# EAGLE board 1 (EAGLE 7.2.0)
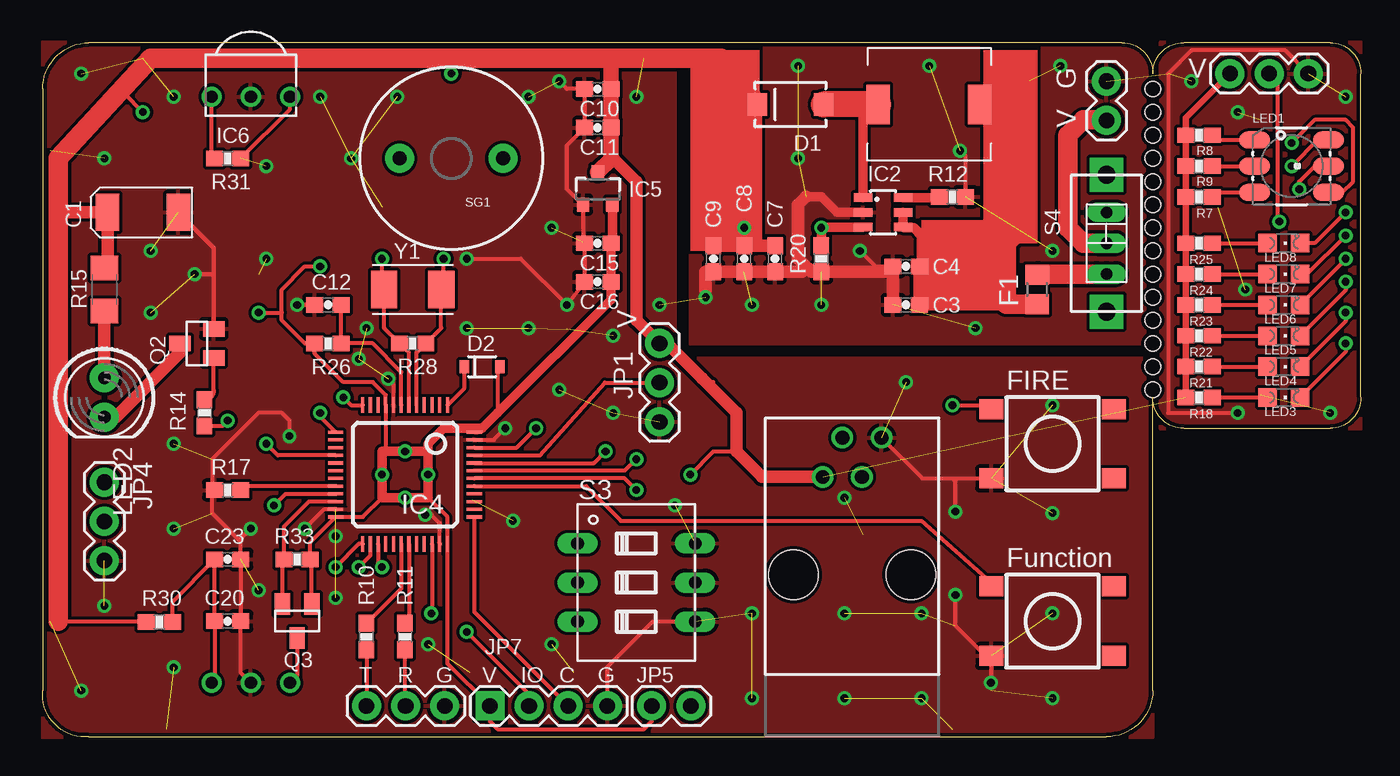
[diagram p0: board, top side]
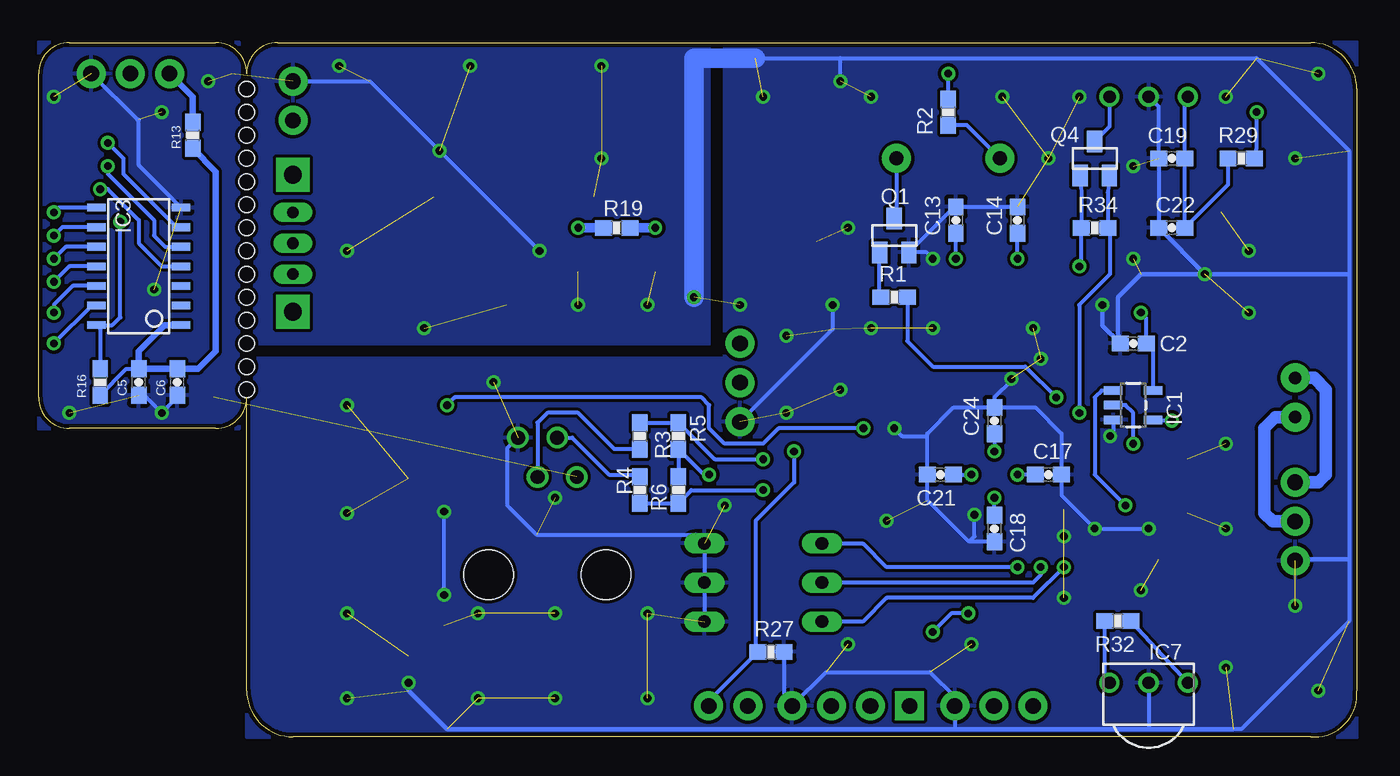
[diagram p1: board, bottom side, seen from below]

Size 85.51 x 45.01 mm. Coordinates in mm from the lower left corner, seen from the top.
Outline: 83.51,45.01 74.01,45.01 arc90 72.01,43.01 arc90 70.01,45.01 3.01,45.01 arc90 0.01,42.01 0.01,3.01 arc100 3.01,0.01 69.01,0.01 arc90 72.01,3.01 72.01,22.01 arc90 74.01,20.01 83.51,20.01 arc90 85.51,22.01 85.51,43.01 arc90 83.51,45.01
Copper layers (1*16): Top 0.035mm / dielectric 1.5mm / Bottom 0.035mm
Design rules "default *": minimum track width 10mil, minimum drill 0.5mm, track to track 8mil, track to pad 8mil, pad to pad 8mil, via to via 8mil, smd to smd 8mil, copper to edge 10mil, drill to drill 8mil, minimum pad ring 10mil, minimum via ring 8mil, stop-mask expansion 4mil, vias tented up to drill 0mil, thermal gap 10mil
Holes 1 mm at 72.01,42.01 72.01,40.51 72.01,39.01 72.01,37.51 72.01,36.01 72.01,34.51 72.01,33.01 72.01,31.51 72.01,30.01 72.01,28.51 72.01,27.01 72.01,25.51 72.01,24.01 72.01,22.51

## Footprints (pad centres in the part's own frame; a part is rotated, then mirrored left to right if it is on the bottom)
EIA6032 = smd 1.5 x 2.4: P$1 -2.3,0; P$2 2.3,0
0603-CAP = smd 1.1 x 1: 1 -0.85,0; 2 0.85,0
SMA-DIODE = smd 1.27 x 1.47: A -2.15,0; C 2.15,0
SOD-323 = smd 0.63 x 0.83: 1 -1.15,0; 2 1.15,0
R0805 = smd 1.3 x 1.5: 1 -0.95,0; 2 0.95,0
SOT23-5 = smd 0.55 x 1.2: 1 -0.95,-1.3; 2 0,-1.3; 3 0.95,-1.3; 4 0.95,1.3; 5 -0.95,1.3
SOT23-6 = smd 0.55 x 1.2: 1 -0.95,-1.3; 2 0,-1.3; 3 0.95,-1.3; 4 0.95,1.3; 5 0,1.3; 6 -0.95,1.3
SOP-14 = smd 0.5 x 1.2: 1 -3.81,-2.75; 2 -2.54,-2.75; 3 -1.27,-2.75; 4 0,-2.75; 5 1.27,-2.75; 6 2.54,-2.75; 7 3.81,-2.75; 8 3.81,2.75; 9 2.54,2.75; 10 1.27,2.75; 11 0,2.75; 12 -1.27,2.75; 13 -2.54,2.75; 14 -3.81,2.75
TQFP48 = smd 0.2 x 1: 1 -2.75,-4.5; 2 -2.25,-4.5; 3 -1.75,-4.5; 4 -1.25,-4.5; 5 -0.75,-4.5; 6 -0.25,-4.5; 7 0.25,-4.5; 8 0.75,-4.5; 9 1.25,-4.5; 10 1.75,-4.5; 11 2.25,-4.5; 12 2.75,-4.5; 25 2.75,4.5; 26 2.25,4.5; 27 1.75,4.5; 28 1.25,4.5; 29 0.75,4.5; 30 0.25,4.5; 31 -0.25,4.5; 32 -0.75,4.5; 33 -1.25,4.5; 34 -1.75,4.5; 35 -2.25,4.5; 36 -2.75,4.5 | smd 1 x 0.2: 13 4.5,-2.75; 14 4.5,-2.25; 15 4.5,-1.75; 16 4.5,-1.25; 17 4.5,-0.75; 18 4.5,-0.25; 19 4.5,0.25; 20 4.5,0.75; 21 4.5,1.25; 22 4.5,1.75; 23 4.5,2.25; 24 4.5,2.75; 37 -4.5,2.75; 38 -4.5,2.25; 39 -4.5,1.75; 40 -4.5,1.25; 41 -4.5,0.75; 42 -4.5,0.25; 43 -4.5,-0.25; 44 -4.5,-0.75; 45 -4.5,-1.25; 46 -4.5,-1.75; 47 -4.5,-2.25; 48 -4.5,-2.75
SOT23-3 = smd 0.8 x 0.9: 1 -0.95,-1; 2 0.95,-1; 3 0,1.1
TSOP348 = drill 0.8: 1 -2.54,0; 2 0,0; 3 2.54,0
RJ9 = drill 0.889: 1 -1.905,6.35; 2 -0.635,8.89; 3 0.635,6.35; 4 1.905,8.89 | hole 3.2: -3.81,0; 3.81,0
1X03 = drill 1.016 pad 1.88: 1 0,0; 2 2.54,0; 3 5.08,0
1X02 = drill 1.016 pad 1.88: 1 0,0; 2 2.54,0
1X04 = drill 1.016 pad 1.88 square: 1 0,0 | drill 1.016 pad 1.88: 2 2.54,0; 3 5.08,0; 4 7.62,0
CR75_V2 = smd 1.524 x 2.54: P$1 -0.254,0; P$2 6.304,0
LED-TRICOLOR-5050 = smd 2 x 1.1: 1 -2.4,1.7; 2 -2.4,0; 3 -2.4,-1.7; 4 2.4,-1.7; 5 2.4,0; 6 2.4,1.7
LED5MM = drill 0.813 pad 1.88: A -1.27,0; K 1.27,0
CHIPLED_0805 = smd 1.2 x 1.2: A 0,-1.05; C 0,1.05
SOT23 = smd 1 x 1.4: 1 -0.95,-1.1; 2 0.95,-1.1; 3 0,1.1
0603-RES = smd 1.1 x 1: 1 -0.85,0; 2 0.85,0
1206 = smd 1.6 x 1.8: 1 -1.4,0; 2 1.4,0
TACTILE_SWITCH_TALL = smd 1.55 x 1.3: A1 -3.975,-2.25; A2 3.975,-2.25; B1 -3.975,2.25; B2 3.975,2.25
DIP03YL = drill 0.813 long: 1 -2.54,-3.81; 2 0,-3.81; 3 2.54,-3.81; 4 2.54,3.81; 5 0,3.81; 6 -2.54,3.81
SWITCH-SPDT-AM#6 = drill 0.762 pad 1.27 long: 1 0,2; 2 0,0; 3 0,-2 | drill 1.15 pad 2.184 square: P$1 0,-4.445; P$2 0,4.445
BUZZER-12MM-KIT = drill 0.9 pad 1.88: + 3.35,0; - -3.35,0
CRYSTAL-TXC-7A = smd 1.7 x 2.4: P$1 1.85,0; P$2 -1.85,0

## Placement (x,y rotation side)
C1  100uf  [EIA6032]  6.51,34.01 0 top
C2  100nf  [0603-CAP]  14.51,25.51 180 bottom
C3  100nf  [0603-CAP]  56.01,28.01 180 top
C4  10uf  [0603-CAP]  56.01,30.51 180 top
C5  1uf  [0603-CAP]  79.01,23.01 90 bottom
C6  100nf  [0603-CAP]  76.51,23.01 90 bottom
C7  10uf  [0603-CAP]  47.51,31.01 90 top
C8  10uf  [0603-CAP]  45.51,31.01 90 top
C9  100nf  [0603-CAP]  43.51,31.01 90 top
C10  1uf  [0603-CAP]  36.01,42.01 180 top
C11  100nf  [0603-CAP]  36.01,39.51 180 top
C12  1uf  [0603-CAP]  18.51,28.01 180 top
C13  20p  [0603-CAP]  26.01,33.51 90 bottom
C14  20p  [0603-CAP]  22.01,33.51 90 bottom
C15  1uf  [0603-CAP]  36.01,32.01 180 top
C16  100nf  [0603-CAP]  36.01,29.51 180 top
C17  100nf  [0603-CAP]  20.01,17.01 0 bottom
C18  100nf  [0603-CAP]  23.51,13.51 270 bottom
C19  100nf  [0603-CAP]  12.01,37.51 180 bottom
C20  100nf  [0603-CAP]  12.01,7.51 0 top
C21  100nf  [0603-CAP]  27.01,17.01 180 bottom
C22  4.7uf  [0603-CAP]  12.01,33.01 180 bottom
C23  4.7uf  [0603-CAP]  12.01,11.51 0 top
C24  4.7uf  [0603-CAP]  23.51,20.51 90 bottom
D1  SS34  [SMA-DIODE]  48.51,41.01 180 top
D2  BAT20JFILM  [SOD-323]  28.51,24.01 0 top
F1  [R0805]  64.51,29.01 270 top
IC1  SN74LVC1G08  [SOT23-5]  14.51,21.51 270 bottom
IC2  FP6291  [SOT23-6]  54.51,34.01 270 top
IC3  TM1809  [SOP-14]  79.01,30.51 90 bottom
IC4  STM32F10XCXT6  [TQFP48]  23.51,17.01 180 top
IC5  [SOT23-3]  36.01,35.51 0 top
IC6  TSOP34830  [TSOP348]  13.51,41.51 180 top
IC7  TSOP34830  [TSOP348]  13.51,3.51 0 bottom
J1  RJ9PTH  [RJ9]  52.51,10.51 0 top
JP1  [1X03]  40.01,25.51 270 top
JP2  [1X03]  77.01,43.01 0 top
JP3  M02PTH  [1X02]  69.01,42.51 270 top
JP4  [1X03]  4.01,16.51 270 top
JP5  M02PTH  [1X02]  39.51,2.01 0 top
JP6  [1X03]  21.01,2.01 0 top
JP7  [1X04]  29.01,2.01 0 top
L1  4.7uh  [CR75_V2]  60.51,41.01 180 top
LED1  LED-TRICOLOR-5050NO_IC  [LED-TRICOLOR-5050]  81.01,37.01 0 top
LED2  IR  [LED5MM]  4.01,22.01 270 top
LED3  [CHIPLED_0805]  80.51,22.01 270 top
LED4  [CHIPLED_0805]  80.51,24.01 270 top
LED5  [CHIPLED_0805]  80.51,26.01 270 top
LED6  [CHIPLED_0805]  80.51,28.01 270 top
LED7  [CHIPLED_0805]  80.51,30.01 270 top
LED8  [CHIPLED_0805]  80.51,32.01 270 top
Q1  8050  [SOT23]  30.01,32.51 0 bottom
Q2  8050  [SOT23]  10.01,25.51 90 top
Q3  2N7002  [SOT23]  16.51,7.51 180 top
Q4  2N7002  [SOT23]  17.01,37.51 0 bottom
R1  2.2K  [0603-RES]  30.01,28.51 0 bottom
R2  180R  [0603-RES]  26.51,40.51 90 bottom
R3  100R  [0603-RES]  46.51,19.51 90 bottom
R4  100R  [0603-RES]  46.51,16.01 270 bottom
R5  10K  [0603-RES]  44.01,19.51 270 bottom
R6  10K  [0603-RES]  44.01,16.01 90 bottom
R7  470R  [0603-RES]  75.01,35.01 180 top
R8  470R  [0603-RES]  75.01,39.01 180 top
R9  470R  [0603-RES]  75.01,37.01 180 top
R10  220R  [0603-RES]  21.01,6.51 90 top
R11  220R  [0603-RES]  23.51,6.51 90 top
R12  47k  [0603-RES]  59.01,35.01 180 top
R13  100R  [0603-RES]  75.51,39.01 90 bottom
R14  2.2K  [0603-RES]  10.51,21.01 270 top
R15  51  [1206]  4.01,29.01 90 top
R16  10K  [0603-RES]  81.51,23.01 270 bottom
R17  10K  [0603-RES]  12.01,16.01 180 top
R18  470R  [0603-RES]  75.01,22.01 180 top
R19  110K(47K)  [0603-RES]  48.01,33.01 0 bottom
R20  15K(6.4K)  [0603-RES]  50.51,31.01 90 top
R21  470R  [0603-RES]  75.01,24.01 180 top
R22  470R  [0603-RES]  75.01,26.01 180 top
R23  470R  [0603-RES]  75.01,28.01 180 top
R24  470R  [0603-RES]  75.01,30.01 180 top
R25  470R  [0603-RES]  75.01,32.01 180 top
R26  10K  [0603-RES]  18.51,25.51 180 top
R27  10K  [0603-RES]  38.01,5.51 180 bottom
R28  1m  [0603-RES]  24.01,25.51 0 top
R29  100R  [0603-RES]  7.51,37.51 0 bottom
R30  100R  [0603-RES]  7.58,7.46 180 top
R31  47K  [0603-RES]  12.01,37.51 180 top
R32  47K  [0603-RES]  15.51,7.51 0 bottom
R33  10K  [0603-RES]  16.51,11.51 0 top
R34  10K  [0603-RES]  17.01,33.01 180 bottom
S1  SWITCH-MOMENTARY-2SMD-4  [TACTILE_SWITCH_TALL]  65.51,7.51 180 top
S2  SWITCH-MOMENTARY-2SMD-4  [TACTILE_SWITCH_TALL]  65.51,19.01 180 top
S3  [DIP03YL]  38.51,10.01 270 top
S4  [SWITCH-SPDT-AM#6]  69.01,32.01 0 top
SG1  BUZZERPTH-KIT  [BUZZER-12MM-KIT]  26.51,37.51 180 top
Y1  8M  [CRYSTAL-TXC-7A]  24.01,29.01 180 top

## Library data of the parts
C1 = SparkFun-Capacitors
C2-C24 L1 R1-R14 R16-R34 = SparkFun-Passives
D1 Q1 Q2 = SparkFun-DiscreteSemi
D2 = SparkFun-DiscreteSemi; PROD_ID: DIO-11623
F1 LED3-LED8 S4 = digital-toy
IC1 = SparkFun-DigitalIC
IC2 IC3 = eagle_lib_lishen
IC4 = stm32
IC5 = SparkFun-PowerIC
IC6 IC7 = vishay-1
J1 JP1-JP7 = SparkFun-Connectors
LED1 LED2 = SparkFun-LED
Q3 Q4 = SparkFun-DiscreteSemi; PROD_ID: TRANS-00830
R15 = SparkFun-Resistors
S1 S2 = SparkFun-Electromechanical
S3 = switch-dil; OC_FARNELL: unknown; OC_NEWARK: unknown
SG1 = SparkFun-Electromechanical; PROD_ID: COMP-08253
Y1 = SparkFun-FreqCtrl

## Nets
3.3V: C2.1 C15.1 C16.1 C17.1 C18.1 C21.1 C24.1 D2.2 IC1.5 IC4.9 IC4.24 IC4.36 IC4.48 IC5.2 JP5.1 JP7.1 Q3.1 Q4.1 R26.2 R33.2 R34.2
5V: C1.P$1 C7.2 C8.2 C9.2 C10.1 C11.1 D1.C IC5.3 J1.1 JP1.1 JP2.1 R2.2 R5.2 R6.2 R7.2 R8.2 R9.2 R13.2 R15.2 R18.2 R19.2 R21.2 R22.2 R23.2 R24.2 R25.2 R29.2 R30.2
BTN_F1: IC4.41 S1.A2
BTN_RELOAD: IC4.46 S2.A2
BUZZER: IC4.12 R1.2
DIP_SW1: IC4.27 S3.1
DIP_SW2: IC4.26 S3.2
DIP_SW3: IC4.25 S3.3
GND: C1.P$2 C2.2 C3.2 C4.2 C5.1 C6.1 C7.1 C8.1 C9.1 C10.2 C11.2 C12.2 C13.2 C14.2 C15.2 C16.2 C17.2 C18.2 C19.2 C20.2 C21.2 C22.2 C23.2 C24.2 IC1.3 IC2.2 IC3.7 IC4.8 IC4.23 IC4.35 IC4.47 IC5.1 IC6.2 IC7.2 J1.4 JP1.3 JP2.3 JP3.1 JP4.3 JP6.3 JP7.4 Q1.2 Q2.2 R12.1 R17.2 R20.1 R27.1 S1.B2 S2.B2 S3.4 S3.5 S3.6
I2C_SCL: IC4.42 R4.2 R6.1
I2C_SDA: IC4.43 R3.2 R5.1
IR_EMITTER: IC1.1 IC4.21
IR_RECEIVE1: IC4.13 Q4.2 R34.1
IR_RECEIVE2: IC4.22 Q3.2 R33.1
LED_MCU: IC4.45 JP1.2
LED_TM: IC3.14 JP2.2 R16.1
N$1: IC4.20 R17.1
N$2: IC4.44 JP5.2 R27.2
N$3: C13.1 IC4.5 R28.2 Y1.P$2
N$4: C14.1 IC4.6 R28.1 Y1.P$1
N$5: D2.1 IC4.1
N$6: IC1.4 R14.2
N$7: JP3.2 S4.2
N$8: JP4.2 LED2.K Q2.3
N$9: Q2.1 R14.1
N$10: F1.1 S4.3
N$11: C19.1 C22.1 IC6.3 R29.1 R31.2
N$12: C20.1 C23.1 IC7.3 R30.1 R32.2
N$13: IC3.4 LED1.5
N$14: JP4.1 LED2.A R15.1
N$15: IC3.5 LED1.6
N$16: IC3.6 LED1.4
N$17: LED1.2 R9.1
N$18: LED1.1 R8.1
N$19: LED1.3 R7.1
N$20: C3.1 C4.1 F1.2 IC2.4 IC2.5 L1.P$1
N$21: IC3.13 LED3.C
N$22: D1.A IC2.1 L1.P$2
N$23: IC2.6 R12.2
N$24: LED3.A R18.1
N$25: IC2.3 R19.1 R20.2
N$26: LED4.A R21.1
N$27: IC3.12 LED4.C
N$28: IC3.11 LED5.C
N$29: IC3.10 LED6.C
N$30: IC3.9 LED7.C
N$31: IC3.8 LED8.C
N$32: LED5.A R22.1
N$33: LED6.A R23.1
N$34: LED7.A R24.1
N$35: LED8.A R25.1
N$36: C5.2 C6.2 IC3.1 R13.1 R16.2
N$37: IC4.30 R10.2
N$38: IC4.31 R11.2
N$39: J1.3 R3.1
N$40: J1.2 R4.1
N$41: R2.1 SG1.+
N$42: Q1.3 SG1.-
N$43: Q1.1 R1.1
N$44: C12.1 IC4.7 R26.1
N$45: IC6.1 Q4.3 R31.1
N$47: IC7.1 Q3.3 R32.1
PWM_38K: IC1.2 IC4.16
SWDCLK: IC4.37 JP7.3
SWDIO: IC4.34 JP7.2
USART_RX: JP6.2 R11.1
USART_TX: JP6.1 R10.1

## Tracks (layer width: path | path; a pad name or v marks a point on that pad's centre or on a via)
3.3V  (via drill 0.5)
  Top 0.254: IC4.48 28.26,19.76 28.51,20.01 | 23.26,18.76 v23.51,18.51 | 22.01,15.51 20.76,14.26 IC4.24 17.36,12.61 R33.2 17.46,11.41 Q3.1 | 25.01,15.51 26.26,14.26 IC4.36 26.26,4.76 JP7.1 29.01,1.01 29.51,0.51 39.01,0.51 39.51,1.01 JP5.1 | 22.51,18.51 22.26,18.76 IC4.9 22.26,22.16 21.41,23.01 19.51,23.01 17.66,24.86 R26.2 17.01,25.51 15.51,27.01 15.51,27.51 | D2.2 29.51,23.86 29.51,21.01 | 15.51,27.51 15.51,29.01 17.01,30.51 v18.01,30.51 | v14.01,27.51 15.51,27.51
  Top 0.61: 25.01,18.51 25.01,19.01 26.01,20.01 28.51,20.01 29.51,21.01 36.86,28.36 C16.1 C15.1 36.96,32.11 IC5.2 | 25.01,18.51 v25.01,17.01 25.01,15.51 v23.51,15.51 22.01,15.51 v22.01,17.01 22.01,18.51 22.51,18.51 v23.51,18.51 25.01,18.51
  Bottom 0.254: C2.1 13.56,25.91 | Q4.1 17.86,35.31 R34.2 17.86,30.66 v18.01,30.51 | C2.1 13.66,27.16 v14.01,27.51 | IC1.5 13.21,25.06 C2.1 | C17.1 v22.01,17.01 | C24.1 v23.51,18.51 | C21.1 v25.01,17.01 | C18.1 v23.51,15.51
5V  (via drill 0.5)  (1 unrouted)
  Top 0.254: v26.51,43.01 26.51,44.01 | v6.51,40.51 5.32,41.7 5.32,42.18 | 43.51,23.01 42.76,23.01 42.76,23.26 | R30.2 1.01,7.46 1.01,7.51 | v42.01,17.01 43.51,18.51 45.01,18.51
  Top 0.406: R18.2 R21.2 R22.2 R23.2 R24.2 R25.2 R7.2 R9.2 R8.2 74.16,40.16 JP2.1
  Top 0.61: D1.C 46.36,32.86 | 46.36,31.81 46.36,32.01 46.36,32.86 | 46.36,32.86 v45.51,33.01 | 36.36,43.86 36.51,44.01
  Top 0.813: R15.2 4.01,30.31 4.21,30.51 C1.P$1 1.01,34.01 | 37.66,44.01 37.51,44.01 | 37.16,43.86 37.01,44.01 | J1.1 46.66,16.86 45.01,18.51 45.01,21.01 42.76,23.26 40.51,25.51 JP1.1 38.51,27.01 38.51,36.01 37.06,37.46 36.86,37.46 | 36.66,43.86 36.51,44.01 | C9.2 C8.2 46.36,31.86 | C7.2 46.36,31.86 | 46.36,31.86 46.36,32.01
  Top 1.016: 37.16,43.86 36.86,43.56 C10.1 C11.1 36.86,37.46 IC5.3
  Top 1.27: 1.01,7.51 1.01,34.01 1.01,37.51 5.32,42.18 7.01,44.01 26.51,44.01 36.51,44.01 37.01,44.01 37.51,44.01 44.01,44.01 D1.C
  Bottom 0.254: R2.2 v26.51,43.01 | R29.2 6.51,38.16 v6.51,40.51 | R6.2 R5.2 42.36,17.01 v42.01,17.01
  Bottom 0.406: R13.2 75.51,41.51 JP2.1
  Bottom 0.61: v45.51,33.01 R19.2
BTN_F1
  Top 0.254: S1.A2 61.54,9.99 57.01,14.01 37.51,14.01 35.26,16.26 IC4.41
BTN_RELOAD  (via drill 0.5)
  Top 0.254: IC4.46 30.76,18.76 v32.01,20.01 | v59.01,21.51 61.29,21.51 S2.A2
  Bottom 0.254: v32.01,20.01 37.51,20.01 38.51,19.01 41.01,19.01 42.01,20.01 42.01,21.51 42.51,22.01 58.51,22.01 v59.01,21.51
BUZZER  (via drill 0.5)
  Top 0.254: v19.51,22.01 20.01,21.51 IC4.12
  Bottom 0.254: R1.2 29.16,25.66 27.51,24.01 21.51,24.01 v19.51,22.01
DIP_SW1  (via drill 0.5)
  Top 0.254: IC4.27 21.76,11.26 v22.01,11.01
  Bottom 0.254: v22.01,11.01 30.51,11.01 32.01,12.51 34.66,12.51 S3.1
DIP_SW2  (via drill 0.5)
  Top 0.254: IC4.26 21.26,11.76 v20.51,11.01
  Bottom 0.254: v20.51,11.01 20.51,10.51 21.01,10.01 S3.2
DIP_SW3  (via drill 0.5)
  Top 0.254: IC4.25 20.51,12.51 v19.01,11.01
  Bottom 0.254: v19.01,11.01 21.01,9.01 30.51,9.01 32.05,7.47 S3.3
GND  (via drill 0.5)  (59 unrouted)
  Top 0.254: IC7.2 12.86,4.16 C20.2 C23.2 12.86,12.66 12.76,12.76 | v77.51,21.01 73.01,21.01 73.01,43.01 74.51,44.51 80.59,44.51 JP2.3 | v59.51,38.01 59.86,37.66 R12.1 | v27.51,31.01 31.01,31.01 v34.01,28.01 C16.2 C15.2 35.06,32.11 IC5.1 35.01,34.51 34.01,35.51 34.01,38.36 C11.2 C10.2 34.01,42.01 v33.51,42.51 | 12.76,12.76 11.01,14.51 11.01,15.86 R17.2 11.01,16.16 11.01,18.01 14.01,21.01 15.51,21.01 16.01,20.51 v16.01,19.51 | IC4.23 18.26,14.76 v17.01,13.51 | v13.51,13.51 12.76,12.76 | S3.4 39.57,7.47 36.61,4.51 36.61,2.03 JP7.4 | J1.4 57.06,16.76 59.01,16.76 | 59.01,16.76 S2.B2 | S1.B2 61.16,5.26 59.21,7.21 v59.21,9.21 | v59.21,14.61 59.21,16.56 59.01,16.76 | IC4.35 25.76,13.86 25.21,14.41 v24.81,14.41 | IC4.8 22.76,22.86 v22.41,23.21 | v53.01,31.51 54.01,30.51 C4.2 | IC4.47 29.26,19.26 v30.01,20.01
  Top 0.305: v61.51,3.51 61.54,3.54 S1.B2 | C1.P$2 11.11,31.71 11.11,30.01 | 11.11,30.01 Q2.2 | v9.86,30.01 11.11,30.01 | C12.2 v16.51,28.01
  Top 0.61: 49.51,35.01 50.51,35.01 51.51,34.01 IC2.2
  Top 0.813: 49.26,30.76 49.86,30.16 R20.1 54.81,30.16 C4.2 C3.2 | 49.26,30.76 49.01,31.01 49.01,34.51 49.51,35.01 | 49.26,30.76 49.26,30.16 C7.1 C8.1 C9.1 43.01,30.16 v43.01,28.51
  Bottom 0.254: IC6.2 12.86,40.86 C19.2 C22.2 | C6.1 76.51,22.01 v77.51,21.01 78.66,22.16 C5.1 | IC3.7 79.01,37.07 79.01,40.01 79.09,40.01 JP2.3 | JP3.1 64.01,42.51 v59.51,38.01 v53.01,31.51 | v34.01,28.01 34.01,26.43 JP1.3 | v27.51,31.01 27.91,31.41 Q1.2 26.11,34.36 C13.2 C14.2 | v13.51,13.51 v17.01,13.51 19.16,15.66 C17.2 19.16,19.66 20.86,21.36 C24.2 | S3.4 S3.5 S3.6 42.88,13.11 53.21,13.11 55.11,15.01 55.11,18.71 J1.4 | v59.21,9.21 v59.21,14.61 | 39.01,44.01 33.51,44.01 | 33.51,44.01 6.51,44.01 0.51,38.01 0.51,30.01 0.51,11.51 0.51,7.51 7.51,0.51 8.01,0.51 | v24.81,14.41 24.81,13.01 25.16,12.66 | v22.41,23.21 22.41,23.11 23.51,22.01 C24.2 | R27.1 37.16,2.54 JP7.4 34.43,4.21 27.71,4.21 26.09,2.59 JP6.3 26.09,0.59 26.01,0.51 | IC7.2 13.51,0.51 | v33.51,42.51 33.51,44.01 | IC1.3 15.81,19.71 v16.01,19.51 | C18.2 25.16,12.66 | 25.16,12.66 27.86,15.36 C21.2 27.86,19.51 | 27.86,19.51 27.86,19.66 26.16,21.36 C24.2 | v30.01,20.01 29.51,19.51 27.86,19.51
  Bottom 0.305: 8.01,0.51 13.51,0.51 26.01,0.51 59.01,0.51 61.51,3.01 v61.51,3.51 | JP4.3 3.93,11.51 0.51,11.51 | C22.2 v9.86,30.01 | v9.86,30.01 0.51,30.01 | v9.86,30.01 14.01,30.01 15.51,28.51 15.51,26.16 C2.2 16.51,26.66 v16.51,28.01
  Bottom 1.27: 39.01,44.01 43.01,44.01 v43.01,28.51
  other vias: 83.51,21.01 78.01,29.01 2.51,43.01 4.01,37.51 8.51,41.51 18.01,41.51 14.51,37.01 20.01,37.51 23.01,41.51 31.51,41.51 38.51,41.51 7.01,31.51 14.51,31.01 33.01,33.01 7.01,27.51 21.01,26.51 20.51,24.51 27.51,26.51 31.51,26.51 33.51,22.51 8.51,19.01 37.01,21.01 8.51,13.51 19.01,13.01 4.01,8.51 2.51,3.01 8.51,4.51 14.01,9.51 19.01,9.01 25.01,6.01 30.51,14.01 33.01,6.01 41.01,15.01 46.01,8.01 46.01,2.51 52.01,8.01 52.01,2.51 57.01,8.01 57.01,2.51 65.51,2.51 65.51,14.51 52.01,15.51 65.51,21.51 56.01,23.01 37.01,26.01 40.01,28.01 49.01,43.51 49.01,37.51 46.01,28.01 50.51,28.01 60.51,26.51 57.51,43.51 66.01,43.51 65.51,31.51 74.51,42.51 77.51,40.51 84.51,41.51 65.51,8.01
  pour Top: 42.01,45.01 42.01,25.51 72.01,25.51 72.01,45.01
  pour Bottom: 72.01,45.01 72.01,25.51 42.01,25.51 42.01,45.01
  pour Bottom: 0.01,45.01 41.01,45.01 41.01,24.51 72.01,24.51 72.01,0.01 0.01,0.01
  pour Bottom: 72.51,45.01 85.51,45.01 85.51,20.01 72.51,20.01
  pour Top: 0.01,45.01 0.01,0.01 72.01,0.01 72.01,24.51 41.01,24.51 41.01,45.01
  pour Top: 72.51,45.01 72.51,20.01 85.51,20.01 85.51,45.01
I2C_SCL  (via drill 0.5)
  Top 0.254: v38.51,16.01 37.76,16.76 IC4.42
  Bottom 0.254: R4.2 R6.1 43.16,16.01 v38.51,16.01
I2C_SDA  (via drill 0.5)
  Top 0.254: v38.51,18.01 37.76,17.26 IC4.43
  Bottom 0.254: R3.2 R5.1 41.66,18.01 v38.51,18.01
IR_EMITTER  (via drill 0.5)
  Top 0.254: v15.01,15.01 15.76,15.76 IC4.21
  Bottom 0.254: v15.01,15.01 17.01,17.01 17.01,22.01 16.56,22.46 IC1.1
IR_RECEIVE1  (via drill 0.5)
  Top 0.254: v18.01,21.01 18.01,20.76 IC4.13
  Bottom 0.254: Q4.2 16.16,35.31 R34.1 16.01,32.86 16.01,30.01 18.01,28.01 v18.01,21.01
IR_RECEIVE2
  Top 0.254: IC4.22 17.26,15.26 15.66,13.66 R33.1 15.56,11.41 Q3.2
LED_MCU
  Top 0.254: IC4.45 32.26,18.26 36.47,22.97 JP1.2
LED_TM  (via drill 0.5)
  Top 0.254: v80.21,33.41 80.11,33.51 80.11,42.45 JP2.2
  Bottom 0.254: R16.1 81.51,26.45 IC3.14 80.72,26.7 80.21,27.21 v80.21,33.41
N$1
  Top 0.254: IC4.20 13.11,16.26 R17.1
N$2  (via drill 0.5)
  Top 0.254: IC4.44 35.76,17.76 v36.51,18.51
  Bottom 0.254: v36.51,18.51 36.51,16.51 39.01,14.01 39.01,5.66 R27.2 42.05,2.32 JP5.2
N$3  (via drill 0.5)
  Top 0.254: IC4.5 24.26,24.91 R28.2 25.86,26.51 Y1.P$2 26.01,29.16 v26.01,31.01
  Bottom 0.254: v26.01,31.01 C13.1
N$4  (via drill 0.5)
  Top 0.254: IC4.6 23.76,24.91 R28.1 22.16,26.51 Y1.P$1 22.01,29.16 v22.01,31.01
  Bottom 0.254: v22.01,31.01 C14.1
N$5
  Top 0.254: IC4.1 27.36,22.61 D2.1
N$6  (via drill 0.5)
  Top 0.254: R14.2 11.66,20.16 v12.01,20.51
  Bottom 0.254: v12.01,20.51 13.16,20.51 IC1.4
N$7
  Top 1.27: S4.2 67.51,32.01 66.51,33.01 66.51,39.01 67.51,40.01 68.97,40.01 JP3.2
N$8
  Top 0.813: LED2.K 4.74,20.74 8.91,24.91 Q2.3
  Bottom 0.813: LED2.K 5.28,20.74 6.01,20.01 6.01,14.51 5.47,13.97 JP4.2
N$9
  Top 0.254: R14.1 arc90 11.11,22.46 Q2.1
N$10
  Top 1.27: F1.1 64.56,30.01 S4.3
N$11
  Top 0.254: IC6.3 10.97,37.7 R31.2
  Bottom 0.254: IC6.3 11.16,41.32 R31.2 C22.1 8.36,35.81 R29.1
N$12
  Top 0.254: R30.1 8.43,8.78 C23.1 C20.1 11.16,3.7 IC7.3
  Bottom 0.254: R32.2 IC7.3
N$13  (via drill 0.5)
  Top 0.254: LED1.5 82.51,37.01 81.51,36.01 v81.51,35.51
  Bottom 0.254: v81.51,35.51 81.01,35.51 79.01,33.51 79.01,32.01 77.51,30.51 IC3.4
N$14
  Top 0.813: R15.1 LED2.A
  Bottom 0.813: LED2.A 2.78,23.28 2.01,22.51 2.01,17.01 2.51,16.51 JP4.1
N$15  (via drill 0.5)
  Top 0.254: LED1.6 82.71,38.71 v81.01,37.01
  Bottom 0.254: v81.01,37.01 81.01,36.51 78.01,33.51 78.01,32.51 77.28,31.78 IC3.5
N$16  (via drill 0.5)
  Top 0.254: LED1.4 84.31,35.31 85.01,36.01 85.01,39.51 84.51,40.01 82.51,40.01 v81.01,38.51
  Bottom 0.254: v81.01,38.51 80.01,37.51 80.01,36.51 76.55,33.05 IC3.6
N$17
  Top 0.254: R9.1 LED1.2
N$18
  Top 0.254: 78.31,39.01 LED1.1 75.66,38.71 R8.1
N$19
  Top 0.254: R7.1 75.66,35.31 LED1.3
N$20
  Top 0.61: 57.16,32.36 57.01,32.51 | 57.01,32.51 56.51,33.01 55.86,33.01 IC2.4 IC2.5 | C4.1 57.01,30.51 57.01,32.51
  Top 0.813: 62.51,28.06 56.86,28.06 | 56.86,28.06 C3.1 | 56.86,28.06 C4.1
  Top 1.27: F1.2 62.51,28.06 62.51,32.01 63.51,33.01 63.51,37.01 62.51,38.01 62.51,40.01 61.51,41.01 L1.P$1
N$21  (via drill 0.5)
  Top 0.254: v84.51,25.51 84.51,24.96 LED3.C
  Bottom 0.254: IC3.13 82.05,27.97 v84.51,25.51
N$22
  Top 0.61: IC2.1 53.21,40.71 53.51,41.01
  Top 1.676: L1.P$2 53.51,41.01 D1.A
N$23
  Top 0.61: IC2.6 58.11,34.96 R12.2
N$24
  Top 0.254: R18.1 LED3.A
N$25  (via drill 0.5)
  Top 0.61: IC2.3 50.56,33.06 v50.51,33.01 R20.2
  Bottom 0.61: R19.1 v50.51,33.01
N$26
  Top 0.254: R21.1 LED4.A
N$27  (via drill 0.5)
  Top 0.254: v84.51,27.51 84.51,26.96 LED4.C
  Bottom 0.254: IC3.12 83.28,29.24 84.51,28.01 v84.51,27.51
N$28  (via drill 0.5)
  Top 0.254: v84.51,29.51 84.51,28.96 LED5.C
  Bottom 0.254: IC3.11 83.51,30.51 v84.51,29.51
N$29  (via drill 0.5)
  Top 0.254: v84.51,31.01 84.51,30.96 LED6.C
  Bottom 0.254: IC3.10 83.74,31.78 v84.51,31.01
N$30  (via drill 0.5)
  Top 0.254: v84.51,32.51 82.01,30.01 LED7.C
  Bottom 0.254: IC3.9 83.97,33.05 v84.51,32.51
N$31  (via drill 0.5)
  Top 0.254: v84.51,34.01 82.51,32.01 LED8.C
  Bottom 0.254: IC3.8 84.2,34.32 v84.51,34.01
N$32
  Top 0.254: R22.1 LED5.A
N$33
  Top 0.254: R23.1 LED6.A
N$34
  Top 0.254: R24.1 LED7.A
N$35
  Top 0.254: R25.1 LED8.A
N$36
  Bottom 0.254: R16.2 79.81,23.86 C5.2
  Bottom 0.406: R13.1 74.01,36.66 74.01,25.01 75.16,23.86 C6.2 C5.2 79.01,25.01 77.32,26.7 IC3.1
N$37
  Top 0.254: IC4.30 23.26,9.61 R10.2
N$38
  Top 0.254: IC4.31 23.76,7.61 R11.2
N$39
  Bottom 0.254: R3.1 48.16,18.66 50.51,21.01 52.51,21.01 53.15,20.38 J1.3
N$40
  Bottom 0.254: J1.2 50.9,19.4 48.51,17.01 46.66,17.01 R4.1
N$41
  Bottom 0.254: SG1.+ 25.31,39.66 R2.1
N$42
  Bottom 0.254: SG1.- 29.86,33.76 Q1.3
N$43
  Bottom 0.254: R1.1 30.96,28.61 Q1.1
N$44
  Top 0.254: IC4.7 23.26,23.66 21.41,25.51 R26.1 C12.1
N$45
  Top 0.254: R31.1 16.05,40.7 IC6.1
  Bottom 0.254: IC6.1 16.05,39.57 Q4.3
N$47
  Top 0.254: Q3.3 16.51,3.97 IC7.1
  Bottom 0.254: IC7.1 16.36,3.82 R32.1
PWM_38K  (via drill 0.5)
  Top 0.254: IC4.16 15.26,18.26 v14.51,19.01
  Bottom 0.254: v14.51,19.01 14.51,21.01 15.01,21.51 IC1.2
SWDCLK
  Top 0.254: JP7.3 28.01,8.09 IC4.37
SWDIO  (via drill 0.5)
  Top 0.254: IC4.34 25.26,8.06 v25.21,8.01 | v27.51,6.81 31.55,2.77 JP7.2
  Bottom 0.254: v25.21,8.01 26.31,8.01 v27.51,6.81
USART_RX
  Top 0.254: JP6.2 23.51,2.05 R11.1
USART_TX
  Top 0.254: R10.1 JP6.1
(copper drawn outside any net)
  shapes: Top area x3

## Text on the board
tNames: V | G | V | C1 | V | FIRE | Function | T | R | G | V | IO | C | G